# EAGLE board Power Transfer (EAGLE 7.3.0)
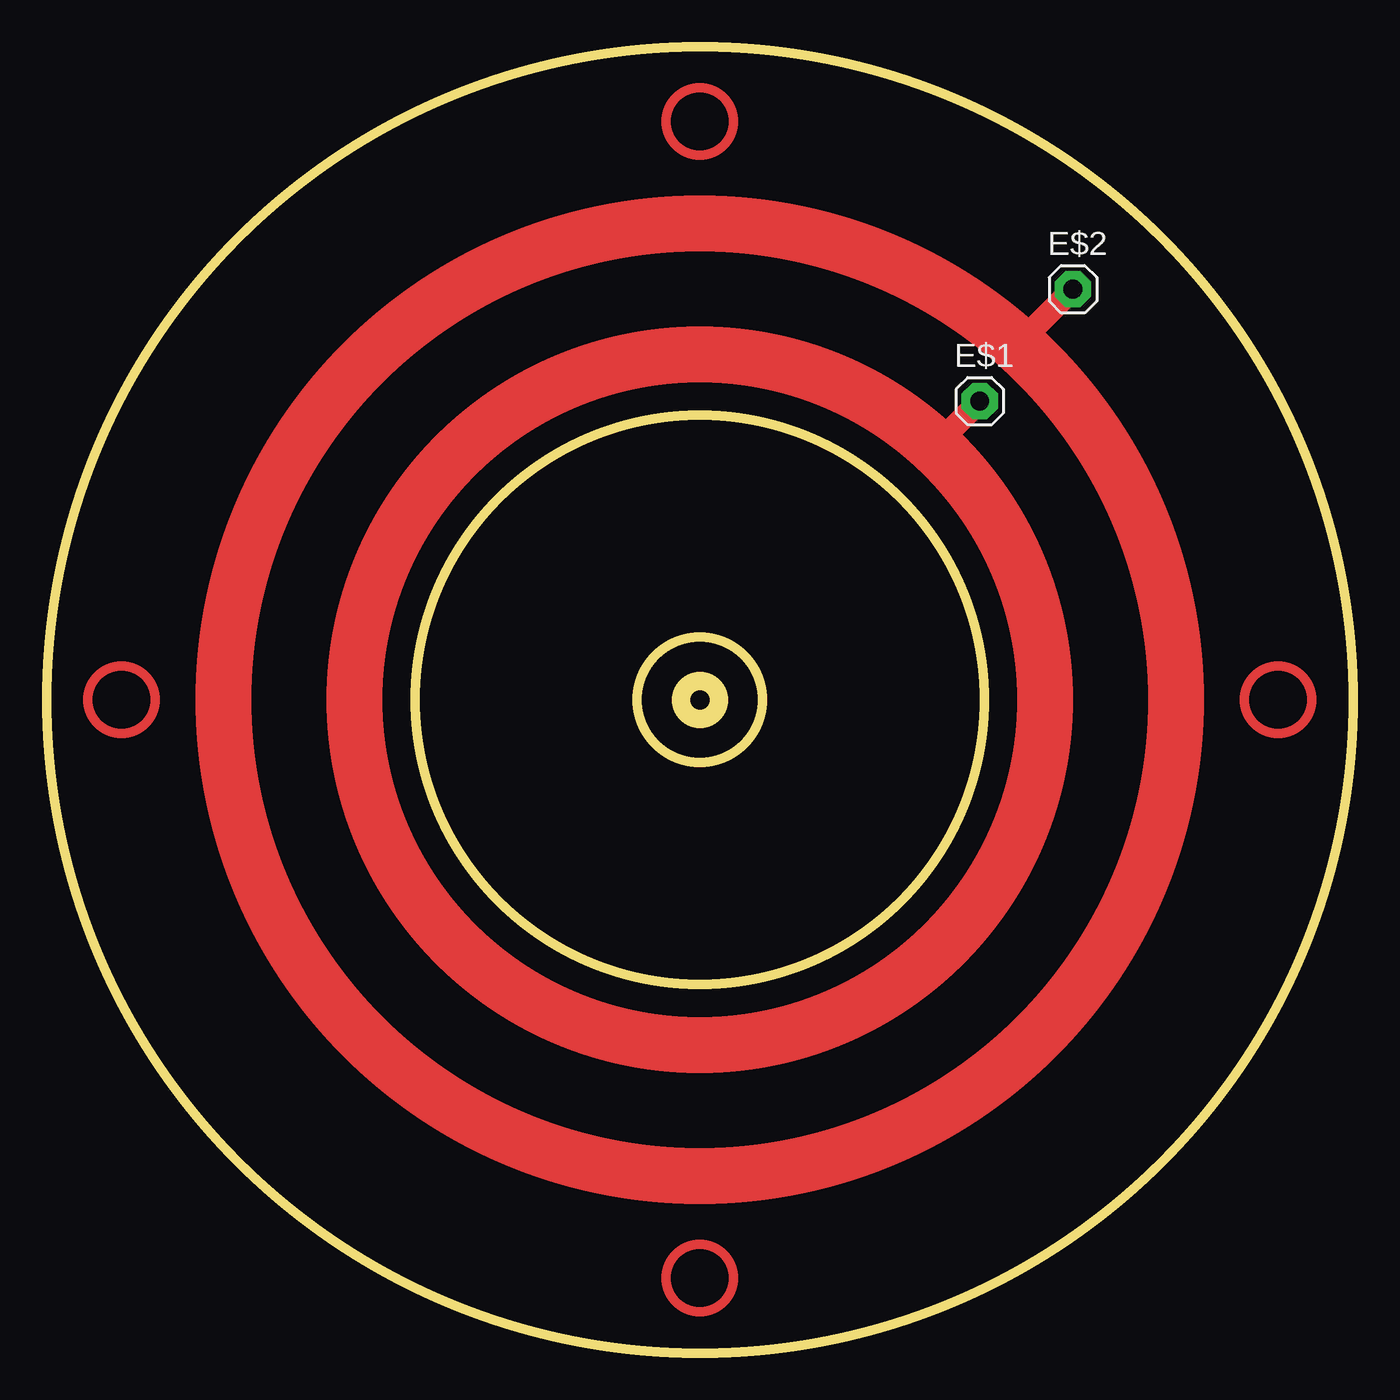
[diagram p0: board, top side]

Size 70 x 70 mm. Coordinates in mm from the lower left corner, seen from the top.
Outline: circle at 35,35 radius 3.35
Outline: circle at 35,35 radius 15.25
Outline: circle at 35,35 radius 35
Outline: circle at 35,35 radius 1
Copper layers (1*16): Top 0.035mm / dielectric 1.5mm / Bottom 0.035mm
Design rules "default": minimum track width 10mil, minimum drill 24mil, track to track 8mil, track to pad 8mil, pad to pad 8mil, via to via 8mil, smd to smd 8mil, copper to edge 40mil, drill to drill 8mil, minimum pad ring 10mil, minimum via ring 8mil, stop-mask expansion 4mil, vias tented up to drill 0mil, thermal gap 10mil

## Footprints (pad centres in the part's own frame; a part is rotated, then mirrored left to right if it is on the bottom)
1X01 = drill 1.016 pad 1.93 octagon: 1 0,0

## Placement (x,y rotation side)
E$1  [1X01]  50,51 0 top
E$2  [1X01]  55,57 0 top

## Library data of the parts
E$1 E$2 = adafruit

## Nets
S$1: E$1.1
S$2: E$2.1

## Tracks (layer width: path | path; a pad name or v marks a point on that pad's centre or on a via)
S$1
  Top 1.27: E$1.1 48,49
S$2
  Top 1.27: E$2.1 52,54
(copper drawn outside any net)
  shapes: Top circle x6